# EAGLE board MagusScreenFit (EAGLE 9.4.0)
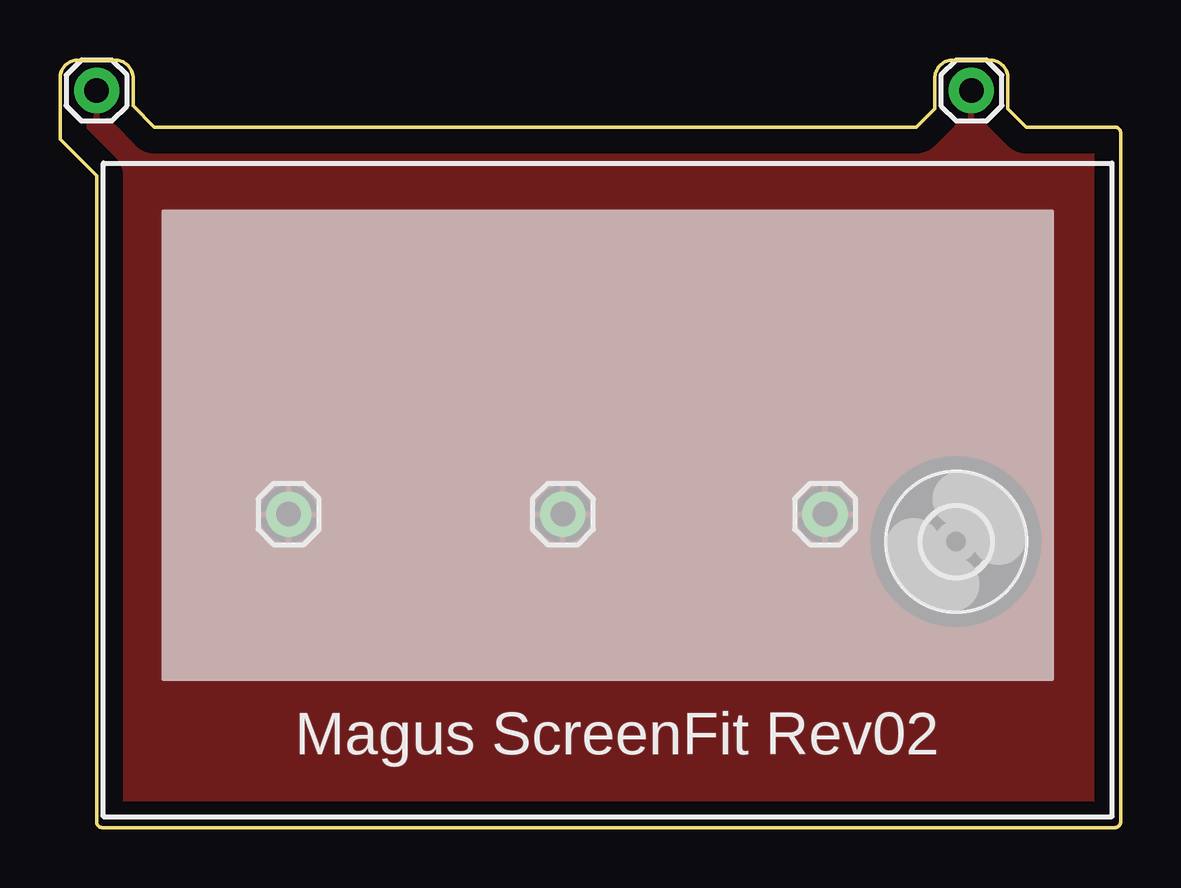
[diagram p0: board, top side]
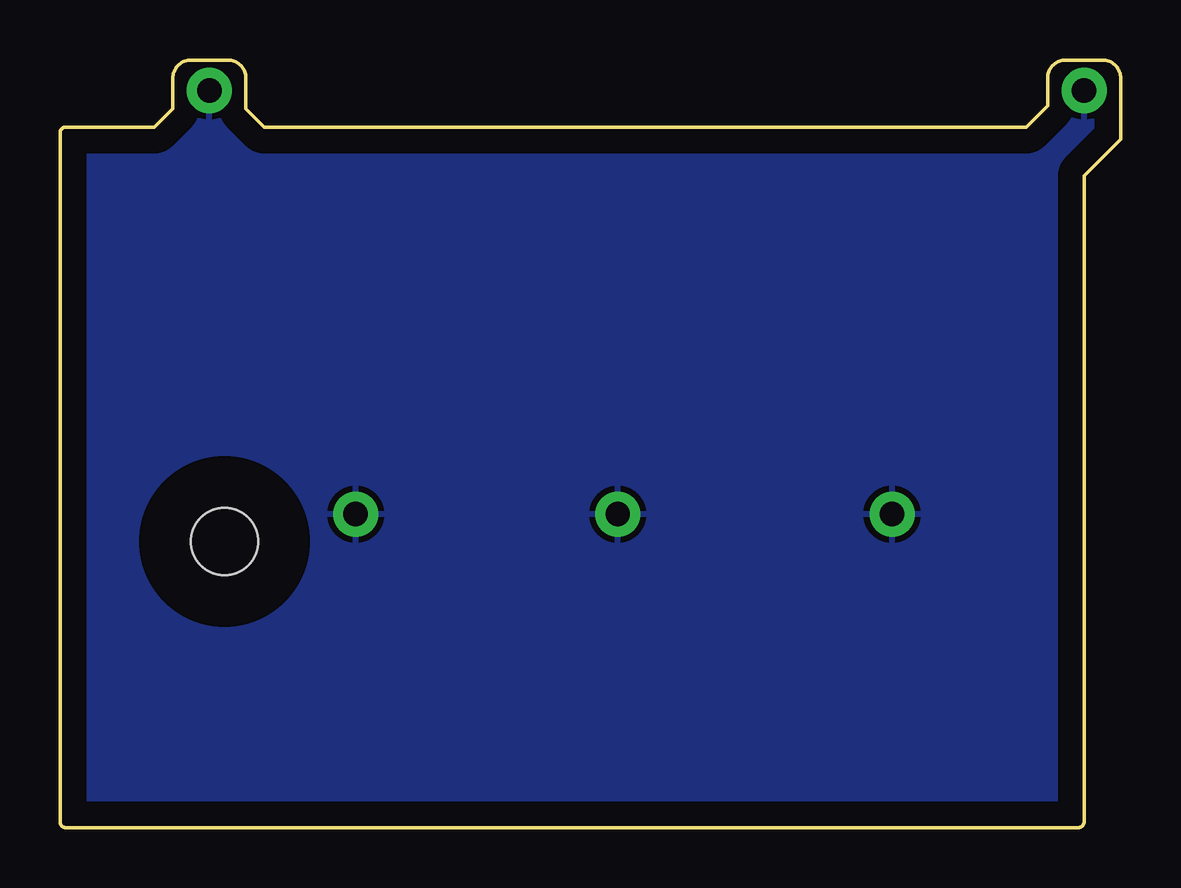
[diagram p1: board, bottom side, seen from below]

Size 44.2 x 31.99 mm. Coordinates in mm from the lower left corner, seen from the top.
Outline: 2.29,31.99 0.76,31.99 arc90 0,31.23 0,28.69 1.52,27.16 1.52,0.25 arc90 1.78,0 43.94,0 arc90 44.2,0.25 44.2,28.94 arc90 43.94,29.19 40.26,29.19 39.5,29.96 39.5,31.23 arc90 38.73,31.99 37.21,31.99 arc90 36.45,31.23 36.45,29.96 35.69,29.19 3.94,29.19 3.05,30.08 3.05,31.23 arc90 2.29,31.99
Copper layers (1*16): Top 0.035mm / dielectric 1.5mm / Bottom 0.035mm
Design rules "default": minimum track width 6mil, minimum drill 0.35mm, track to track 6mil, track to pad 6mil, pad to pad 6mil, via to via 6mil, smd to smd 6mil, copper to edge 40mil, drill to drill 6mil, minimum pad ring 10mil, minimum via ring 8mil, stop-mask expansion 4mil, vias tented up to drill 0mil, thermal gap 10mil

## Footprints (pad centres in the part's own frame; a part is rotated, then mirrored left to right if it is on the bottom)
1X01 = drill 1.016 pad 1.88: 1 0,0
2,8 = hole 2.8: 0,0

## Placement (x,y rotation side)
GND  [1X01]  1.52,30.72 90 top
J1  [1X01]  37.97,30.72 0 top
J2  [1X01]  31.88,13.06 0 top
J3  [1X01]  20.95,13.06 0 top
J4  [1X01]  9.53,13.06 90 top
U$1  [2,8]  37.34,11.92 0 top

## Library data of the parts
GND J1-J4 = SparkFun-Connectors
U$1 = holes

## Nets
GND: GND.1 J1.1 J2.1 J3.1 J4.1

## Tracks (layer width: path | path; a pad name or v marks a point on that pad's centre or on a via)
GND
  pour Top: -1.78,33 46.48,33 46.48,-7.64 -1.78,-7.64
  pour Bottom: -0.51,34.27 47.75,34.27 47.75,-6.37 -0.51,-6.37

## Text on the board
tPlace: Magus ScreenFit Rev02